# Altium PCB PCB1.PcbDoc
Units mm, origin at the board's own origin, x right, y up, seen from the top; angles counter-clockwise.
Board outline 74.6 x 34.6 mm, 2 copper layers (Top Layer, Bottom Layer); 50 components, 37 nets, 156 pads, 0 vias.
Unrouted connection lines stored in the file: 84.
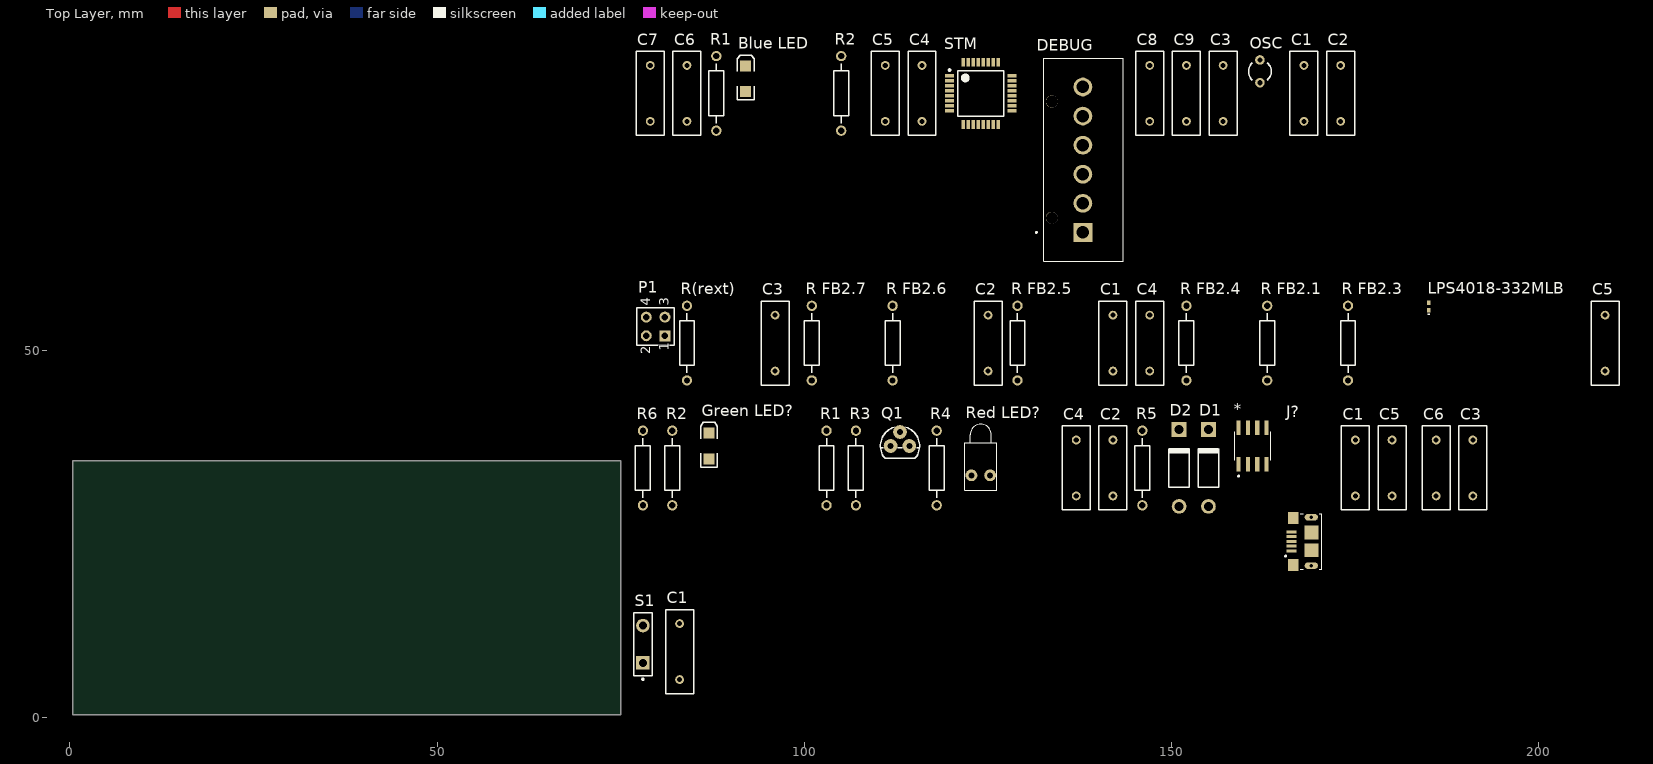
[diagram p0: Top Layer view]
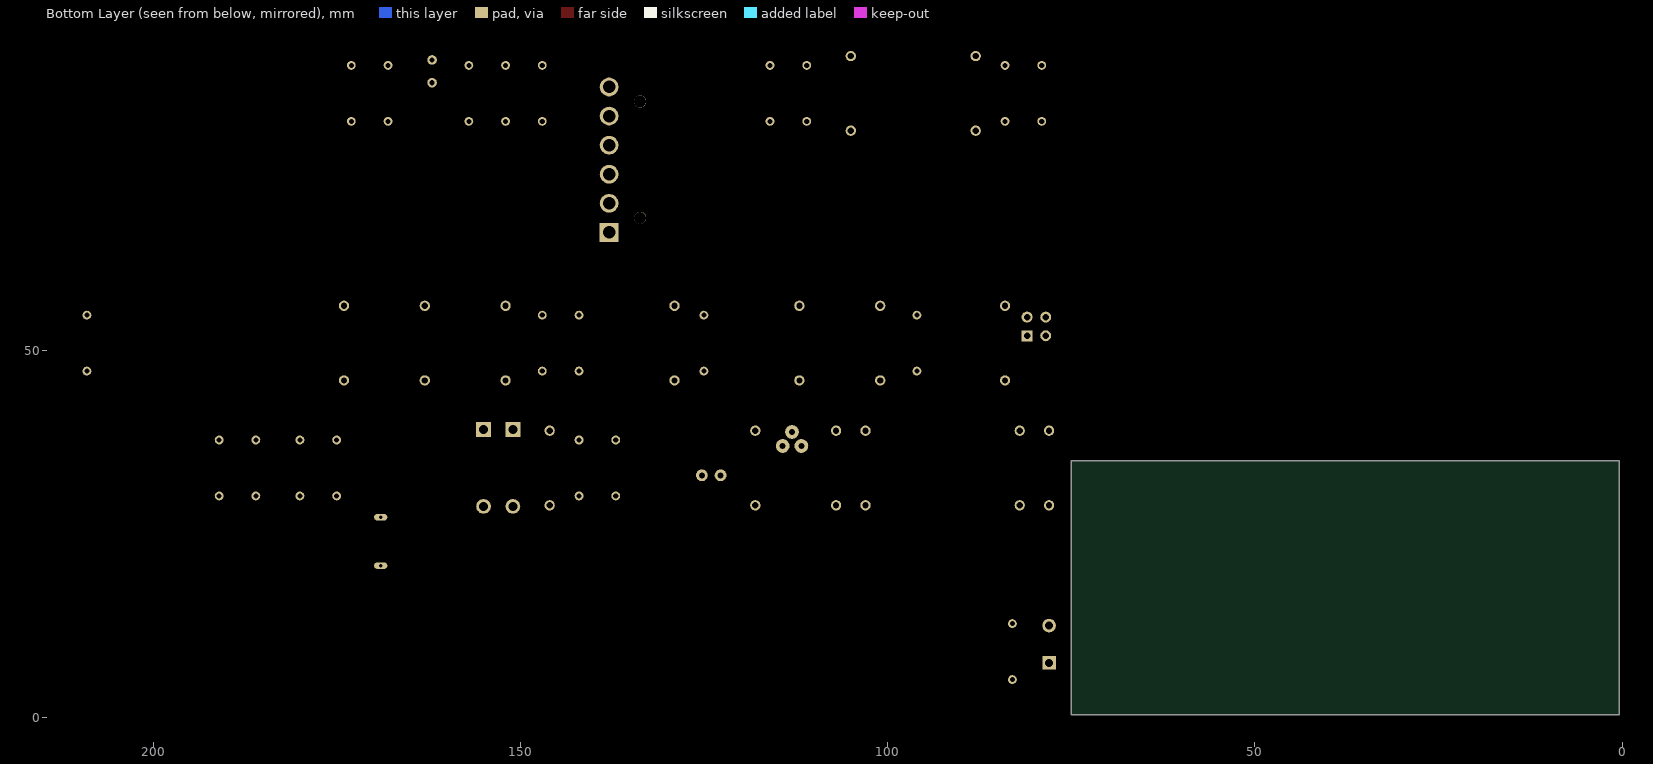
[diagram p1: Bottom Layer view, seen from below]

## Layer stack, top to bottom
Top Solder: solder mask 0.0102, Solder Resist, Dk 3.5
Top Layer: signal copper 0.0356
Dielectric 1: dielectric 0.32, FR-4, Dk 4.8
Bottom Layer: signal copper 0.0356
Bottom Solder: solder mask 0.0102, Solder Resist, Dk 3.5

## Board outline
0.4,0.4 75,0.4 75,35 0.4,35

## Design rules (kind name [scope] priority, off if disabled: settings)
Clearance [All] p1: gap=0.254 ignorepadtopadclearanceinfootprint=FALSE except(0: Arc-Hole Track-Hole SMDPad-Hole THPad-Hole Via-Hole Fill-Hole Poly-Hole Region-Hole Text-Hole)
PolygonConnect [All] p1: connectstyle=Relief reliefconductorwidth=0.254 reliefentries=4 polygonreliefangle="90 Angle" airgapwidth=0.254
RoomDefinition U_MicroController [InComponentClass('U_MicroController')] p1: confinementstyle=ConfineIn formatcopy=TRUE lockcomponents=FALSE outline 76,3 212,3 212,94 76,94
RoomDefinition U_DRV2700 [InComponentClass('U_DRV2700')] p2: confinementstyle=ConfineIn formatcopy=TRUE lockcomponents=FALSE outline 76,3 212,3 212,94 76,94
RoomDefinition "U_Charger 2" [InComponentClass('U_Charger 2')] p3: confinementstyle=ConfineIn formatcopy=TRUE lockcomponents=FALSE outline 76,3 212,3 212,94 76,94
RoomDefinition "Master Schematic Sheet" [InComponentClass('Master Schematic Sheet')] p4: confinementstyle=ConfineIn formatcopy=TRUE lockcomponents=FALSE outline 76,3 178,3 178,94 76,94
RoutingVias [All] p1: holewidth=0.711 width=1.27 viastyle="Through Hole" minholewidth=0.711 minwidth=1.27 maxholewidth=0.711 maxwidth=1.27
SolderMaskExpansion [All] p1: expansion=0.102
Width [All] p1: maxlimit=0.254 minlimit=0.254 preferedwidth=0.254
30 further rules are at their usual default settings.

## Classes and differential pairs
component class U_MicroController: "Blue LED" C1 C2 C3 C4 C5 C6 C7 C8 C9 DEBUG OSC R1 R2 STM
component class U_DRV2700: C1 C2 C3 C4 C5 DRV LPS4018-332MLB P1 "R FB2.1" "R FB2.3" "R FB2.4" "R FB2.5" "R FB2.6" "R FB2.7" R(rext)
component class "U_Charger 2": * C1 C2 C3 C4 C5 C6 D1 D2 "Green LED?" J? Q1 R1 R2 R3 R4 R5 R6 "Red LED?"
component class "Master Schematic Sheet": "3-Cell Bat" C1 S1

## Components (designator, comment, footprint, x,y, rotation, side; value= is the part's Value field where it differs from the comment)
* "LM317L" *SOIC127P600X175-8N 161,37 r90 top
"Blue LED" "LED1" 3.2X1.6X1.1 92,87 r90 top
C1 "Cap" RAD-0.3 175,34 r90 top value=0.1uF
C1 "Cap" RAD-0.3 142,51 r90 top value=100n
C1 "Cap" RAD-0.3 83,9 r90 top value=4.7uF
C1 "Cap" RAD-0.3 168,85 r90 top value="18 pF"
C2 "Cap" RAD-0.3 142,34 r90 top value=100nF
C2 "Cap" RAD-0.3 125,51 r90 top value=100n
C2 "Cap" RAD-0.3 173,85 r90 top value="18 pF"
C3 "Cap" RAD-0.3 191,34 r90 top value=1uF
C3 "Cap" RAD-0.3 96,51 r90 top value=100n
C3 "Cap" RAD-0.3 157,85 r90 top value=100nF
C4 "Cap" RAD-0.3 137,34 r90 top value=100nF
C4 "+10V rating and X5R or X7R" RAD-0.3 147,51 r90 top value=0.1uF
C4 "Cap" RAD-0.3 116,85 r90 top value=100nF
C5 "Cap" RAD-0.3 180,34 r90 top value=0.1uF
C5 "+10V rating and X5R or X7R" RAD-0.3 209,51 r90 top value=0.1uF
C5 "Cap" RAD-0.3 111,85 r90 top value=4.7uF
C6 "Cap" RAD-0.3 186,34 r90 top value=1uF
C6 "Cap" RAD-0.3 84,85 r90 top value=4.7uF
C7 "Cap" RAD-0.3 79,85 r90 top value=100nF
C8 "Cap" RAD-0.3 147,85 r90 top value=1uF
C9 "Cap" RAD-0.3 152,85 r90 top value=0.01uF
D1 "Diode 1N4002" DO-41 155,34 r90 top
D2 "Diode 1N4002" DO-41 151,34 r90 top
DEBUG "SWD_DEBUGGER" Male_header 112,38 r90 top
"Green LED?" "" 3.2X1.6X1.1 87,37 r90 top
J? "10118193-0001LF" *FCI_10118193-0001LF_10118193-0001LF(Primary) 169,24 r90 top
LPS4018-332MLB "CoilCraft" 0402-A 185,56 r90 top value=3.3uH
OSC "ABMM2-14.7456MHZ-E2-T" R38 162,88 r0 top
P1 "Pinger" HDR2X2 81,52 r90 top
Q1 "NPN" *TO-92 113,37 r0 top
R1 "Res2" AXIAL-0.4 103,34 r90 top value=1K
R1 "Res2" AXIAL-0.4 88,85 r90 top value=1K
R2 "Res2" AXIAL-0.4 82,34 r90 top value=1K
R2 "Res2" AXIAL-0.4 105,85 r90 top value=5k
R3 "Res2" AXIAL-0.4 107,34 r90 top value=470
R4 "Res2" AXIAL-0.4 118,34 r90 top value=2K
R5 "Res2" AXIAL-0.4 146,34 r90 top value=1K
R6 "Res2" AXIAL-0.4 78,34 r90 top value=20.8
"R FB2.1" "Res2" AXIAL-0.4 163,51 r90 top value=10.4k
"R FB2.3" "Res2" AXIAL-0.4 174,51 r90 top value=200k
"R FB2.4" "Res2" AXIAL-0.4 152,51 r90 top value=200k
"R FB2.5" "Res2" AXIAL-0.4 129,51 r90 top value=200k
"R FB2.6" "Res2" AXIAL-0.4 112,51 r90 top value=200k
"R FB2.7" "Res2" AXIAL-0.4 101,51 r90 top value=10K
R(rext) "Res2" AXIAL-0.4 84,51 r90 top value=7.32k
"Red LED?" "" LED-1 124,33 r90 top
S1 "SW-SPST" SPST-2 78,10 r90 top
STM "STM32F051K6T6" TQFP68P900X900X160-32N 124,85 r0 top

## Footprints (in the part's own frame and the unit in brackets; to place one, negate y for a bottom-side part, rotate by r counter-clockwise, add the part's x,y. Pads: shape width x height; smd on the part's side, far side on the other; paste and mask are expansions set on the pad)
3.2X1.6X1.1 [mm] "SMT LED; 2 Flat Leads"
  rect 1.5x1.5 smd: 1(-1.75,0) 2(1.75,0)
  silkscreen extent -2.9,-1.15 3.2,1.15
0402-A [mm] "Chip Inductor, Body 1.0x0.5mm, IPC High Density"
  rect 0.6x0.5 smd: 1(-0.5,0) 2(0.5,0)
  silkscreen extent -1.1,-0.15 -1.1,0.15, body extent -0.55,-0.3 0.55,0.3, height 0.55
*FCI_10118193-0001LF_10118193-0001LF(Primary) [mm]
  rect 0.4x1.35 smd: 1(-1.3,2.675) 2(-0.65,2.675) 3(0,2.675) 4(0.65,2.675) 5(1.3,2.675)
  round 0.5 hole 0.5 unplated: None(-3.3,0) None(3.3,0)
  rect 1.6x1.4 smd: S1(-3.2,2.45) S2(3.2,2.45)
  rect 1.9x1.9 smd: S3(1.2,0) S4(-1.2,0)
  oval 0.9x1.8 hole 0.5: S5(-3.3,0) S6(3.3,0)
  silkscreen extent -3.8,-1.45 3.8,3.6
*SOIC127P600X175-8N [mm]
  rect 1.97x0.57 smd: 1(-2.475,1.905) 2(-2.475,0.635) 3(-2.475,-0.635) 4(-2.475,-1.905) 5(2.475,-1.905) 6(2.475,-0.635) 7(2.475,0.635) 8(2.475,1.905)
  silkscreen extent -4.2,-2.45 1.95,2.45
*TO-92 [mil]
  round 74 hole 32: 1(-50,0) 2(0,75) 3(50,0)
  silkscreen extent -105,-65 105,100
AXIAL-0.4 [mm] "Axial Device, Thru-Hole; 2 Leads; 0.4 in Pin Spacing"
  round 1.4 hole 0.85: 1(-5.08,0) 2(5.08,0)
  silkscreen extent -4.06,-1.02 4.06,1.02
DO-41 [mm] "Diode, Axial; Body 5.2 x 2.7 mm (LxDia. max), Lead Dia. 0.86 mm (max)"
  round 2 hole 1.2: 1(-5.23,0)
  rect 2x2 hole 1.2: 2(5.23,0)
  silkscreen extent -2.65,-1.4 2.75,1.4
HDR2X2 [mm] "Connector; Header; 2x2 Position"
  rect 1.5x1.5 hole 0.9: 1(0,0)
  round 1.5 hole 0.9: 2(0,2.54) 3(2.54,0) 4(2.54,2.54)
  silkscreen extent -1.27,-1.27 3.81,3.81
LED-1 [mm] "LED; 2 Leads"
  round 1.6 hole 0.8: 1(0,1.27) 2(0,-1.27)
  silkscreen extent -2,-2.2 6.95,2.2
Male_header [mm]
  rect 2.55x2.55 hole 1.7: 1(28.073,-25.908)
  round 2.55 hole 1.7: 2(32.033,-25.908) 3(35.993,-25.908) 4(39.953,-25.908) 5(43.913,-25.908) 6(47.873,-25.908)
  round 1.63 hole 1.63 unplated: None(30.053,-21.668) None(45.893,-21.668)
  silkscreen extent 24.16,-31.38 51.78,-19.48
R38 [mm] "Crystal, Thru-Hole; 2 Leads; Body 3.1 x 8.2 mm (Dia.xH)"
  round 1.3 hole 0.7: 1(0,1.55) 2(0,-1.55)
  silkscreen extent -1.55,-1.19 1.55,1.17
RAD-0.3 [mm] "Radial Cap, Thru-Hole; 2 Leads; 0.3 in Pin Spacing"
  round 1.2 hole 0.7: 1(-3.81,0) 2(3.81,0)
  silkscreen extent -5.71,-1.91 5.71,1.91
SPST-2 [mm] "Switch; 2 Leads"
  rect 1.85x1.85 hole 1.1: 1(-2.54,0)
  round 1.85 hole 1.1: 2(2.54,0)
  silkscreen extent -4.89,-1.27 4.28,1.27
TQFP68P900X900X160-32N [mm] "TQFP, 32-Leads, Body 7.00x7.00mm, Pitch 0.68mm, IPC Medium Density"
  rect 1.2x0.5 smd: 1(-4.25,2.38) 2(-4.25,1.7) 3(-4.25,1.02) 4(-4.25,0.34) 5(-4.25,-0.34) 6(-4.25,-1.02) 7(-4.25,-1.7) 8(-4.25,-2.38) 17(4.25,-2.38) 18(4.25,-1.7) 19(4.25,-1.02) 20(4.25,-0.34) 21(4.25,0.34) 22(4.25,1.02) 23(4.25,1.7) 24(4.25,2.38)
  rect 0.5x1.2 smd: 9(-2.38,-4.25) 10(-1.7,-4.25) 11(-1.02,-4.25) 12(-0.34,-4.25) 13(0.34,-4.25) 14(1.02,-4.25) 15(1.7,-4.25) 16(2.38,-4.25) 25(2.38,4.25) 26(1.7,4.25) 27(1.02,4.25) 28(0.34,4.25) 29(-0.34,4.25) 30(-1.02,4.25) 31(-1.7,4.25) 32(-2.38,4.25)
  silkscreen extent -4.37,-3.1 3.1,3.3, body extent -4.5,-4.5 4.5,4.5, height 1.6

## Part data
"Blue LED" "Green LED?": library part LED2, "Typical RED, GREEN, YELLOW, AMBER GaAs LED", LatestRevisionDate=17-Jul-2002, LatestRevisionNote="Re-released for DXP Platform.", PackageDescription="SM LED; 2 Flat Leads", PackageReference=3.2X1.6X1.1, PackageVersion=Feb-2002, Published=8-Jun-2000, Publisher="Altium Limited"
C1 C1 C1 C1 C2 C2 C3 C3 C4 C4 C5 C5 C6 C6 C7 C8 C9: "Capacitor", LatestRevisionDate=17-Jul-2002, LatestRevisionNote="Re-released for DXP Platform.", PackageDescription="Radial Cap, Thru-Hole; 2 Leads; 0.3 in Pin Spacing", PackageReference=RAD-0.3, Published=8-Jun-2000, Publisher="Altium Limited"
C2: "must have 105V rating", LatestRevisionDate=17-Jul-2002, LatestRevisionNote="Re-released for DXP Platform.", PackageDescription="Radial Cap, Thru-Hole; 2 Leads; 0.3 in Pin Spacing", PackageReference=RAD-0.3, Published=8-Jun-2000, Publisher="Altium Limited"
C3: "must have a 105V rating", LatestRevisionDate=17-Jul-2002, LatestRevisionNote="Re-released for DXP Platform.", PackageDescription="Radial Cap, Thru-Hole; 2 Leads; 0.3 in Pin Spacing", PackageReference=RAD-0.3, Published=8-Jun-2000, Publisher="Altium Limited"
C4 C5: library part Cap, "Capacitor", LatestRevisionDate=17-Jul-2002, LatestRevisionNote="Re-released for DXP Platform.", PackageDescription="Radial Cap, Thru-Hole; 2 Leads; 0.3 in Pin Spacing", PackageReference=RAD-0.3, Published=8-Jun-2000, Publisher="Altium Limited"
D1 D2: "1 Amp General Purpose Rectifier", Code_JEDEC=DO-204-AL, ComponentLink1Description="Manufacturer Link", ComponentLink1URL=http://www.fairchildsemi.com/, ComponentLink2Description=Datasheet, ComponentLink2URL=http://www.fairchildsemi.com/ds/1N%2F1N4001.pdf, DatasheetVersion=1998, LatestRevisionDate=17-Jul-2002, LatestRevisionNote="Re-released for DXP Platform.", PackageDescription="Diode, Axial; Body 5.2 x 2.7 mm (LxDia. max), Lead Dia. 0.86 mm (max)", PackageReference=DO-41, PackageVersion=Aug-1999, Published=8-Jun-2000, Publisher="Altium Limited"
DEBUG: library part SWD_Header
J?: "Single Port 5 Contact Shielded SMT MICRO USB B-Type Receptacle", Package=None, Availability=Unavailable, MF="Amphenol ICC", MP=10118193-0001LF, Price=None, SnapEDA_Link=https://www.snapeda.com/parts/10118193-0001LF/Amphenol%20ICC/view-part/?ref=snap
LPS4018-332MLB: library part Inductor, "Inductor", Code_IEC=1005, Code_JEITA=0402, LatestRevisionDate=29-May-2009, LatestRevisionNote="IPC-7351 Footprint Added.", PackageDescription="Chip Inductor", PackageReference=0402-A, Published=8-Jun-2000, Publisher="Altium Limited"
OSC: library part XTAL, "Crystal Oscillator", LatestRevisionDate=17-Jul-2002, LatestRevisionNote="Re-released for DXP Platform.", PackageDescription="Crystal, Thru-Hole; 2 Leads; Body 3.1 x 8.2 mm (Dia.xH)", PackageReference=R38, Published=8-Jun-2000, Publisher="Altium Limited"
P1: library part "Header 2X2", "Header, 2-Pin, Dual row", LatestRevisionDate=17-Jul-2002, LatestRevisionNote="Re-released for DXP Platform.", Publisher="Altium Limited"
Q1: library part QNPN, "NPN Bipolar Transistor", LatestRevisionDate=29-May-2009, LatestRevisionNote="IPC-7351 Footprint Added.", PackageDescription="3-Pin SOT-23 Package 0.95 mm Pitch, 2.4 mm Lead Span", PackageReference=SOT-23B, PackageVersion=Aug-1999, Published=8-Jun-2000, Publisher="Altium Limited"
R1 R1 R2 R2 R3 R4 R5 R6 "R FB2.1" "R FB2.3" "R FB2.4" "R FB2.5" "R FB2.6" "R FB2.7": "Resistor", LatestRevisionDate=17-Jul-2002, LatestRevisionNote="Re-released for DXP Platform.", PackageDescription="Axial Device, Thru-Hole; 2 Leads; 0.4 in Pin Spacing", PackageReference=AXIAL-0.4, Published=8-Jun-2000, Publisher="Altium Limited"
  "R FB2.3" "R FB2.4" "R FB2.5" "R FB2.6" "R FB2.7": Digikey=RC0201FR-07200KL
R(rext): "Current-Limiting Control Resistor", LatestRevisionDate=17-Jul-2002, LatestRevisionNote="Re-released for DXP Platform.", PackageDescription="Axial Device, Thru-Hole; 2 Leads; 0.4 in Pin Spacing", PackageReference=AXIAL-0.4, Published=8-Jun-2000, Publisher="Altium Limited"
"Red LED?": library part LED1, "Typical RED GaAs LED", LatestRevisionDate=08-Jul-2005, LatestRevisionNote="Mech Layer 1 removed.", PackageDescription="LED; 2 Leads", PackageReference=LED-1, Published=8-Jun-2000, Publisher="Altium Limited"
S1: "Single-Pole, Single-Throw Switch", LatestRevisionDate=17-Jul-2002, LatestRevisionNote="Re-released for DXP Platform.", PackageDescription="Switch; 2 Leads", PackageReference=SPST-2, Published=24-Mar-1999, Publisher="Altium Limited"
STM: Supplier Part Number 1=511-STM32F051K6T6, Supplier 1=Mouser

## Nets (pads, with @x,y where several pads share a name; then routed paths per layer and width w, separated by ;. In a path a pad name is that pad's centre, name@x,y a point inside that pad or via, vN(x,y) a via of type N, cw(c..) or ccw(c..) an arc to the next point about the centre after c; other vN are vias at no path point)
3V6: C1.2@83,12.81 C4.1@116,81.19 C5.1@111,81.19 C5.2@209,54.81 C6.1@84,81.19 C7.1 C8.1 C9.1 DEBUG.1 LPS4018-332MLB.2 R3.2 R4.2 R6.1 S1.2 STM.17
3V75: C5.1@180,30.19 C6.1@186,30.19 D2.2 R5.1 S1.1
4V3: "R FB2.1.2" "R FB2.3.1"
5V: "Red LED?.1" *.1 C1.1@175,30.19 C2.2@142,37.81 C3.1@191,30.19 D1.2 Q1.1
103V62: "R FB2.7.2"
GND: "R FB2.1.1" C1.1@83,5.19 C1.1@142,47.19 C1.2@168,88.81 C1.2@175,37.81 C2.2@173,88.81 C3.1@96,47.19 C3.1@157,81.19 C3.2@191,37.81 C4.1@147,47.19 C4.2@116,88.81 C5.1@209,47.19 C5.2@111,88.81 C5.2@180,37.81 C6.2 C7.2 C8.2 C9.2 DEBUG.2 DEBUG.3 R1.2@88,90.08 R(rext).1 STM.16 STM.32
Net*_2: *.2 *.3 *.6 *.7 C4.2@137,37.81 D2.1
Net*_4: *.4 C2.1@142,30.19 C4.1@137,30.19 R4.1 R5.2
"NetBlue LED_1": "Blue LED.1" STM.25
"NetBlue LED_2": "Blue LED.2" R1.1@88,79.92
NetC1_1: C1.1@168,81.19 OSC.1
NetC1_2: C1.2@142,54.81 C2.1@125,47.19 R2.1@105,79.92
NetC2_1: C2.1@173,81.19 OSC.2 STM.3
NetC2_2: C2.2@125,54.81
NetC3_2: C3.2@157,88.81 DEBUG.6 STM.4
NetC4_2: C4.2@147,54.81
NetD1_1: D1.1 J?.1
NetDEBUG_4: DEBUG.4 STM.24
NetDEBUG_5: DEBUG.5 STM.23
NetDRV_7: LPS4018-332MLB.1
NetDRV_13: P1.1 P1.3
NetDRV_14: P1.2 P1.4
NetDRV_15: R(rext).2
NetDRV_18: 
NetDRV_19: STM.11
NetDRV_20: STM.13
"NetGreen LED?_1": "Green LED?.1" Q1.3
"NetGreen LED?_2": "Green LED?.2" R2.2@82,39.08
NetJ?_5: J?.5 R1.1@103,28.92 R2.1@82,28.92 R6.2
NetQ1_2: Q1.2 R3.1
NetR1_2: "Red LED?.2" R1.2@103,39.08
NetR2_2: R2.2@105,90.08 STM.9
"NetR FB2.3_2": "R FB2.3.2" "R FB2.4.1"
"NetR FB2.4_2": "R FB2.4.2" "R FB2.5.1"
"NetR FB2.5_2": "R FB2.5.2" "R FB2.6.1"
"NetR FB2.6_2": "R FB2.6.2" "R FB2.7.1"
NetSTM_12: STM.12
pads on no net: *.5 *.8 C3.2@96,54.81 DEBUG.None J?.2 J?.3 J?.4 J?.None J?.S1 J?.S2 J?.S3 J?.S4 J?.S5 J?.S6 STM.1 STM.2 STM.5 STM.6 STM.7 STM.8 STM.10 STM.14 STM.15 STM.18 STM.19 STM.20 STM.21 STM.22 STM.26 STM.27 STM.28 STM.29 STM.30 STM.31

## Text inside footprints (layer, text, board x,y; h text height)
J?: Mechanical 4 "PCB END" at 170.55,28.75 h1.88 r90; Mechanical 4 "PCB END" at 170.55,28.75 h1.88 r90
P1: Top Overlay "1" at 81.508,49.968 h1.27 r90; Top Overlay "2" at 78.968,49.46 h1.27 r90; Top Overlay "4" at 78.968,56.064 h1.27 r90; Top Overlay "3" at 81.508,56.064 h1.27 r90